# Altium PCB BatteryHolder.PcbDoc
Units mm, origin at the board's own origin, x right, y up, seen from the top; angles counter-clockwise.
Board outline 110 x 60 mm, 2 copper layers (Top Layer, Bottom Layer); 33 components, 3 nets, 237 pads, 206 vias.
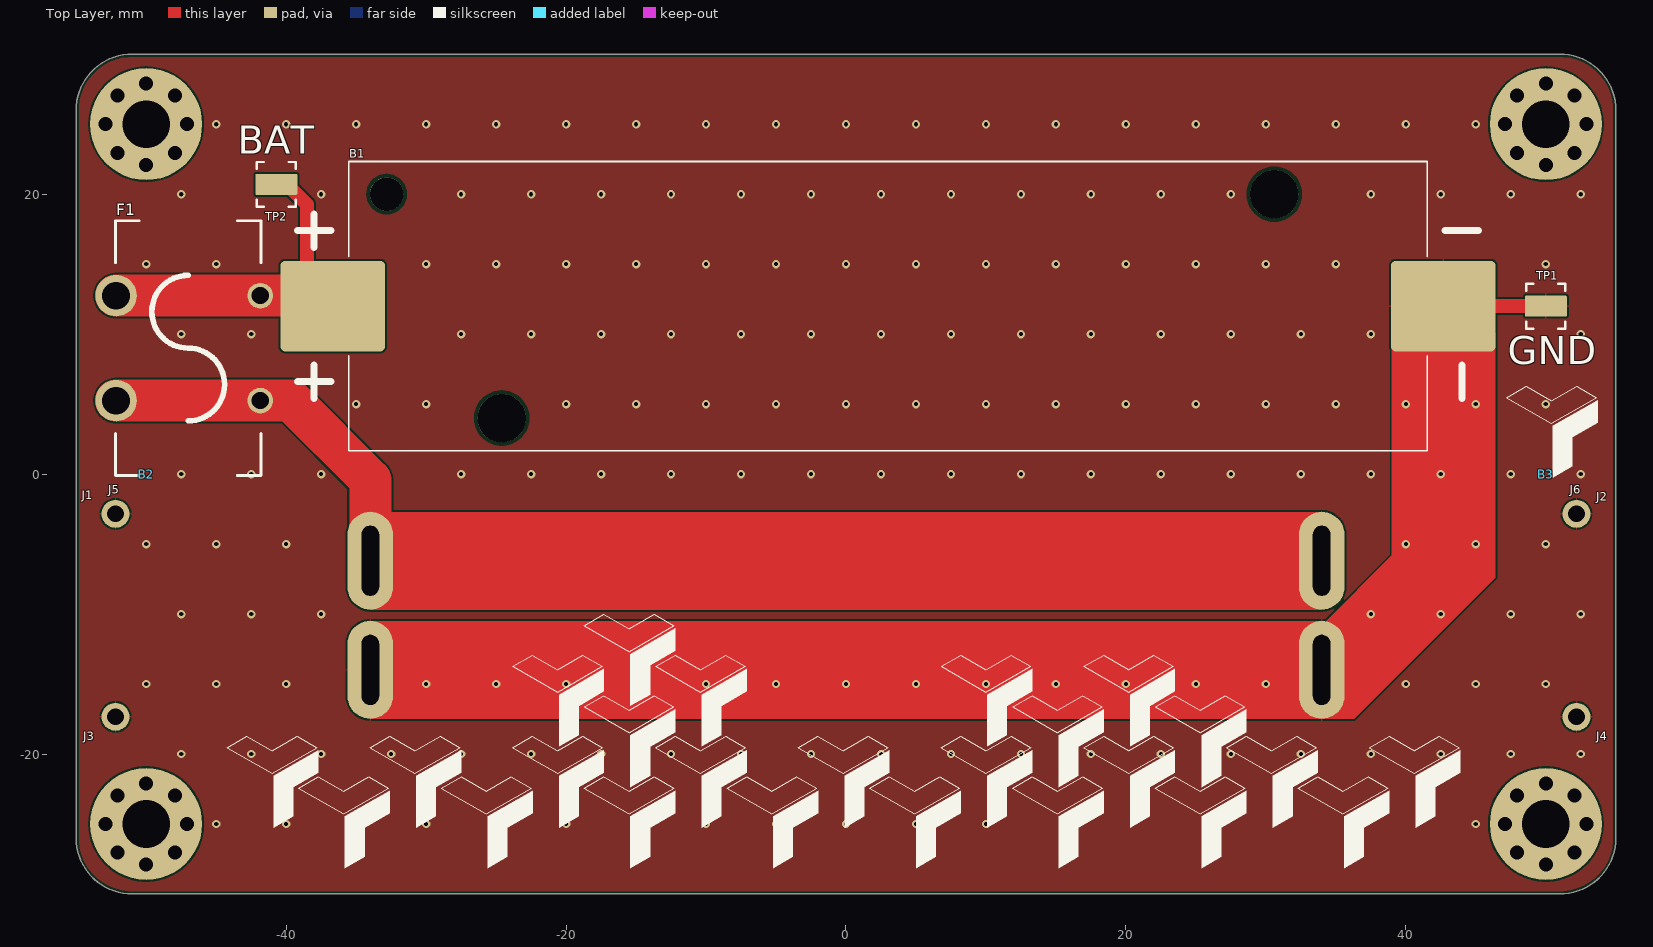
[diagram p0: Top Layer view]
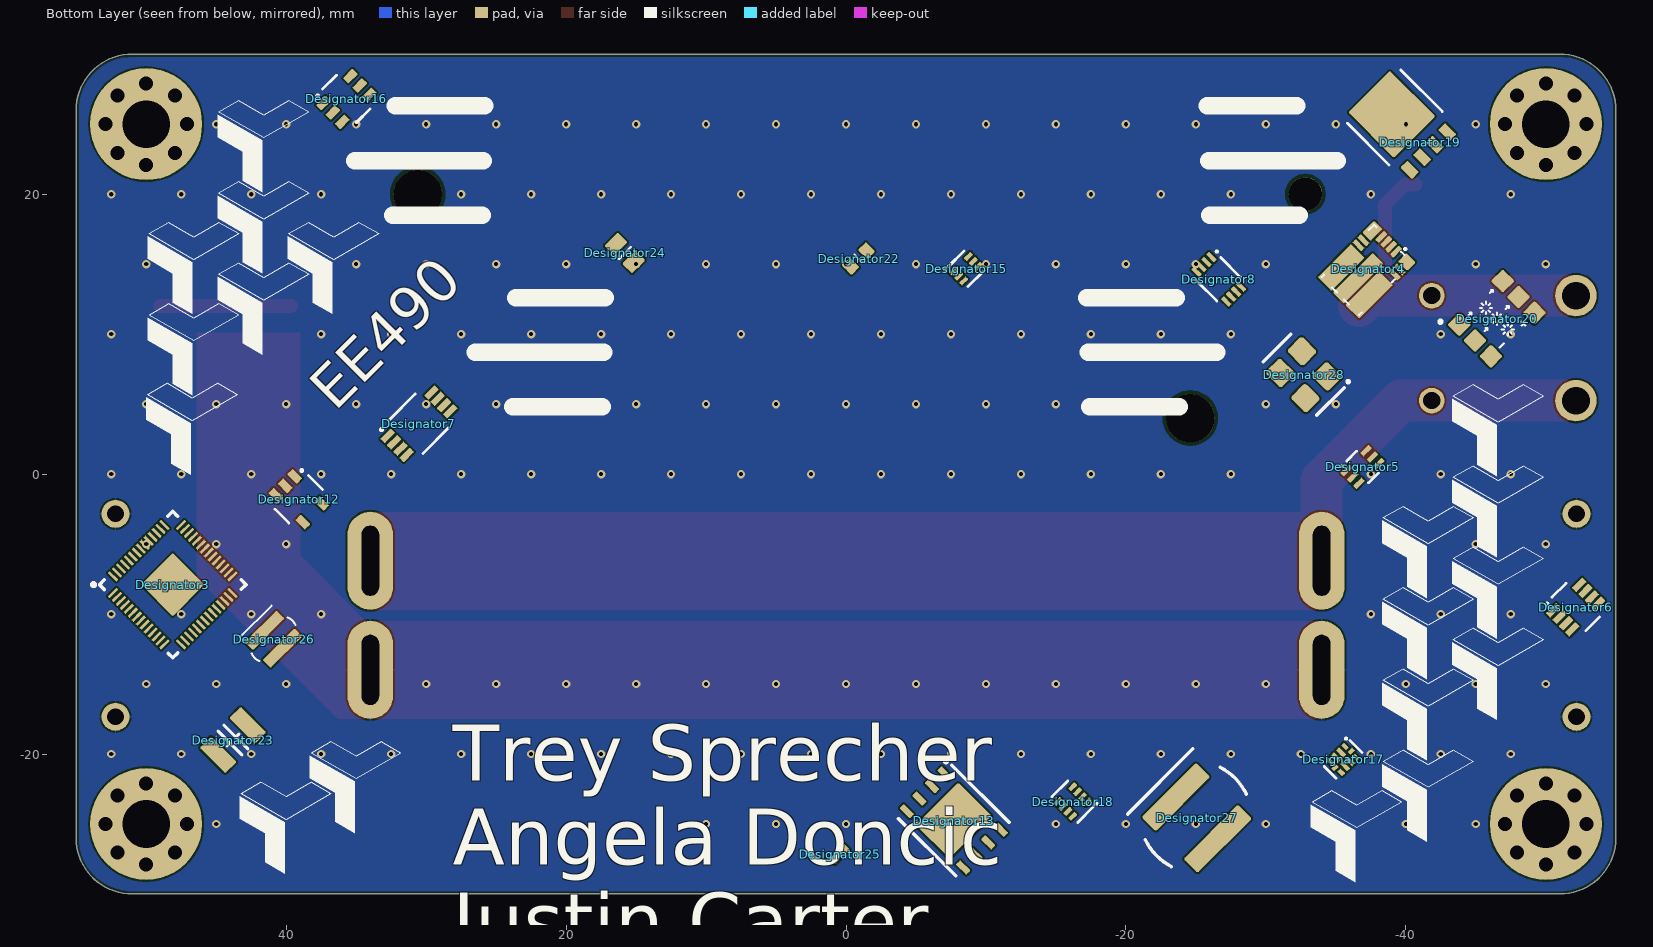
[diagram p1: Bottom Layer view, seen from below]
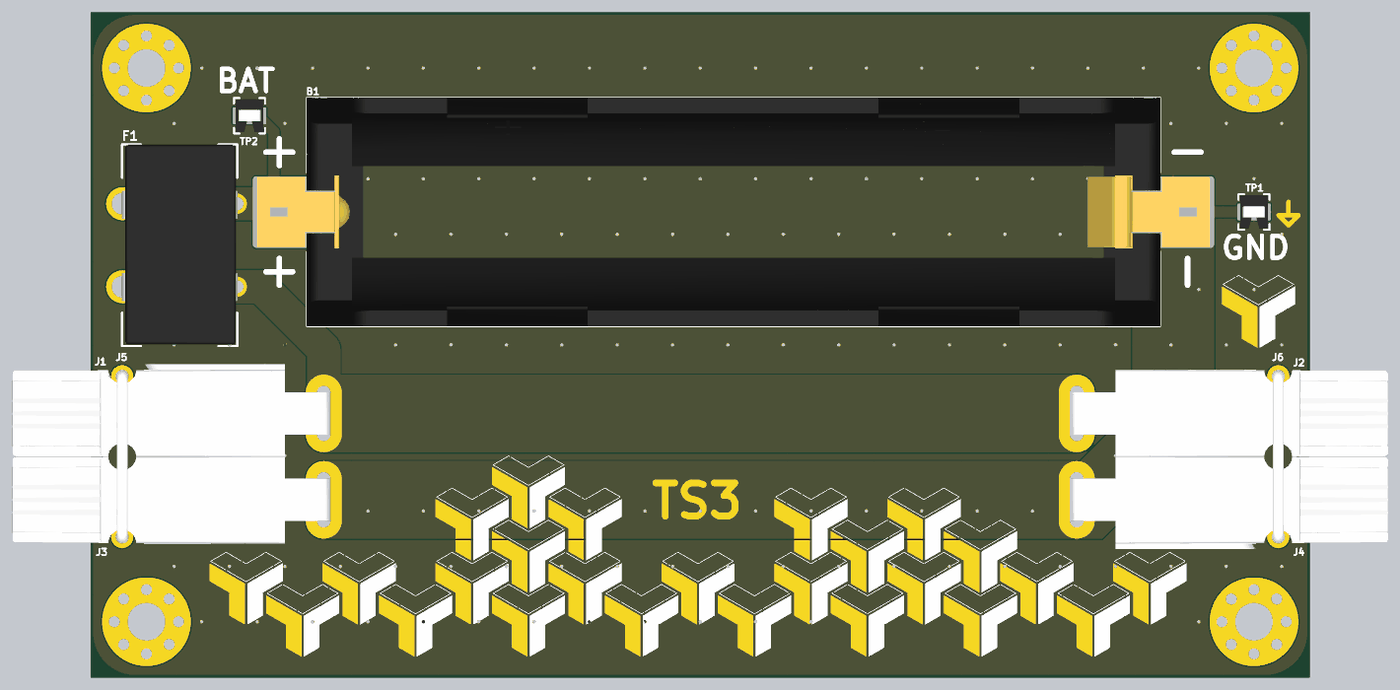
[diagram p2: 3D render of the assembled board from above, using the file's embedded part models]
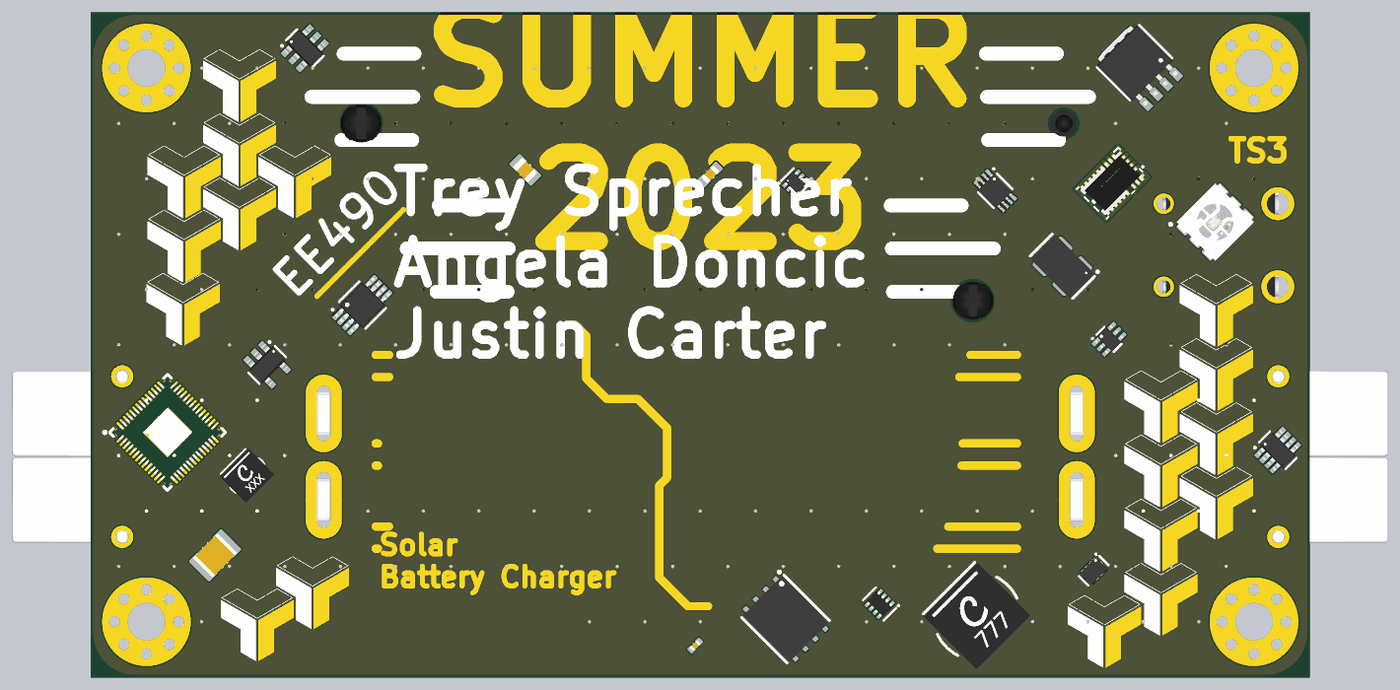
[diagram p3: 3D render of the assembled board from below, using the file's embedded part models]

## Layer stack, top to bottom
Top Solder: solder mask 0.0102, Solder Resist, Dk 3.5
Top Layer: signal copper 0.0356
Dielectric 1: dielectric 0.32, FR-4, Dk 4.8
Bottom Layer: signal copper 0.0356
Bottom Solder: solder mask 0.0102, Solder Resist, Dk 3.5

## Board outline
-55,-26 -55,26 cw(c-51,26) -51,30 51,30 cw(c51,26) 55,26 55,-26 cw(c51,-26) 51,-30 -51,-30 cw(c-51,-26)

## Design rules (kind name [scope] priority, off if disabled: settings)
BoardOutlineClearance [All] p1: gap=0.2 ignorepadtopadclearanceinfootprint=FALSE
Clearance [All] p1: gap=0.127 ignorepadtopadclearanceinfootprint=FALSE except(0.25: Arc-Hole Track-Hole SMDPad-Hole THPad-Hole Via-Hole Fill-Hole Poly-Hole Region-Hole Text-Hole)
ComponentClearance [NOT InComponent('B1') vs NOT InComponent('B1')] p1: gap=0.127 collisioncheckmode=3 verticalgap=0.127 showdistances=TRUE
DiffPairsRouting [All] p1: maxlimit=0.254 minlimit=0.127 mostfreqgap=0.127 toplayer_minwidth=0.127 toplayer_maxwidth=25.4 toplayer_prefwidth=0.127 bottomlayer_minwidth=0.127 bottomlayer_maxwidth=25.4 bottomlayer_prefwidth=0.127 maxuncoupledlength=12.7
DiffPairsRouting DiffPairsRouting_USB [InDifferentialPair('USBD')] p2: maxlimit=0.2 minlimit=0.2 mostfreqgap=0.2 toplayer_minwidth=0.766 toplayer_maxwidth=0.766 toplayer_prefwidth=0.766 bottomlayer_minwidth=0.766 bottomlayer_maxwidth=0.766 bottomlayer_prefwidth=0.766 impedanceprofiledriven=TRUE impedanceprofileid={7DB69605-737D-4C2B-A8A7-E868D9FD1BFF} maxuncoupledlength=12.7
Height [All] p1: minheight=0 maxheight=1816.048 prefheight=12.7
HoleSize [All] p1: absolutevalues=TRUE maxlimit=6.3 minlimit=0.3 maxpercent=80.000 minpercent=20.000
HoleToHoleClearance [All] p1: gap=0.25 allowstackedmicrovias=FALSE
MinimumAnnularRing [All] p1: minimumring=0.15
MinimumSolderMaskSliver [All] p1: minsoldermaskwidth=0
PlaneClearance [All] p1: clearance=0.127
PlaneConnect PlaneConnectPowerPads [InPadClass('PowerPads')] p1: planeconnectstyle=Direct reliefexpansion=0.508 reliefentries=4 reliefconductorwidth=0.254 reliefairgap=0.254
PlaneConnect [All] p2: pad.planeconnectstyle=Relief pad.reliefexpansion=0.3 pad.reliefentries=4 pad.reliefconductorwidth=0.127 pad.reliefairgap=0.127 via.planeconnectstyle=Direct via.reliefexpansion=0.3 via.reliefentries=4 via.reliefconductorwidth=0.127 via.reliefairgap=0.127
PolygonConnect PolygonConnectPowerPads [All vs (InPadClass('PowerPads'))] p1: connectstyle=Direct reliefconductorwidth=0.254 reliefentries=4 polygonreliefangle="90 Angle" airgapwidth=0.254
PolygonConnect [All] p2: thpad.connectstyle=Relief thpad.reliefconductorwidth=0.127 thpad.reliefentries=4 thpad.polygonreliefangle="90 Angle" thpad.airgapwidth=0.127 smdpad.connectstyle=Relief smdpad.reliefconductorwidth=0.127 smdpad.reliefentries=4 smdpad.polygonreliefangle="90 Angle" smdpad.airgapwidth=0.127 via.connectstyle=Direct via.reliefconductorwidth=0.127 via.reliefentries=4 via.polygonreliefangle="90 Angle" via.airgapwidth=0.127
RoutingVias [All] p1: holewidth=0.3 width=0.5 viastyle="Through Hole" minholewidth=0.3 minwidth=0.5 maxholewidth=0.6 maxwidth=6.6
SilkToSilkClearance [All] p1: silktosilkclearance=0
SilkToSolderMaskClearance [IsPad] p1: minsilkscreentomaskgap=0.127 clearancetoexposedcopper=TRUE
SolderMaskExpansion SolderMaskExpansion_Via [IsVia] p1: expansion=0.075 istentingtop=TRUE
SolderMaskExpansion [NOT IsVia] p2: expansion=0.075 istentingtop=FALSE
Width [All] p1: maxlimit=25.4 minlimit=0.127 preferedwidth=0.127 minimp=50.000000 maximp=50.000000 favimp=50.000000
20 further rules are at their usual default settings.

## Classes and differential pairs
component class BatteryHolder: B1 B2 B3 F1 J1 J2 J3 J4 J5 J6 TP1 TP2

## Components (designator, comment, footprint, x,y, rotation, side; value= is the part's Value field where it differs from the comment)
B1 "1042P" BATTERY_HOLDER_KEYSTONE_1042P 3,12 r180 top
B2 "Board Outline Square" PCB_OUTLINE_SQUARE#1 -25,0 r0 top
B3 "Board Outline Square" PCB_OUTLINE_SQUARE#2 25,0 r0 top
Designator3 "Comment" QFN-56(7x7)_RASPBERRYPI 48.1,-7.9 r135 bottom
Designator4 "Comment" QFN-13_EPC_EPC2310X -37.2,14.6 r315 bottom
Designator5 "Comment" SC70-6(DCK0006A)_TI -36.907,0.507 r135 bottom
Designator6 "Comment" SOT23-8(DDF0008A)_TI -52.139,-9.501 r135 bottom
Designator7 "Comment" VSSOP-8(DGK0008A)_TI 30.5,3.6 r135 bottom
Designator8 "Comment" VSSOP-8(DCU0008A)_TI -26.637,13.916 r225 bottom
Designator12 "Comment" SOT23-5(DBV0005A)_TI 39.1,-1.8 r225 bottom
Designator13 "Comment" WSON-8(6x5mm)_WINBOND -7.705,-24.751 r225 bottom
Designator15 "Comment" SOT-563(DRL0006A)_TI -8.577,14.67 r135 bottom
Designator16 "Comment" SOT23-6(DBV0006A)_TI 35.7,26.8 r135 bottom
Designator17 "Comment" WQFN-10(RYZ0010A)_TI -35.516,-20.384 r225 bottom
Designator18 "Comment" SOT-583(DRL0008A)_TI -16.2,-23.4 r315 bottom
Designator19 "Comment" SOT1023(LFPAK56E)_NEXPERIA -39.849,24.851 r135 bottom
Designator20 "Comment" 5X5MM(6PIN)_JLEAD_GENERIC -46.5,11.1 r135 bottom
Designator22 "Comment" CAPACITOR_0603(1608)_GENERIC -0.9,15.4 r135 bottom
Designator23 "Comment" CAPACITOR_1210(3225)_GENERIC 43.8,-19 r315 bottom
Designator24 "Comment" CAPACITOR_0805(2012)_GENERIC 15.8,15.8 r225 bottom
Designator25 "Comment" CAPACITOR_0402(1005)_GENERIC 0.454,-27.154 r315 bottom
Designator26 "Comment" XGL3512_COILCRAFT 40.9,-11.8 r135 bottom
Designator27 "Comment" XGL6060_COILCRAFT -25,-24.5 r135 bottom
Designator28 "Comment" 4-SMD(4-QFN)_SiTime -32.7,7.1 r315 bottom
F1 "3549-2" FUSE_HOLDER_KEYSTONE_3549-2 -47,9 r270 top
J1 "PP45" CONNECTOR_BTOC_PP45_ANDERSON -33.99,-6.19 r270 top
J2 "PP45" CONNECTOR_BTOC_PP45_ANDERSON 33.99,-6.19 r90 top
J3 "PP45" CONNECTOR_BTOC_PP45_ANDERSON -33.99,-13.99 r270 top
J4 "PP45" CONNECTOR_BTOC_PP45_ANDERSON 33.99,-13.99 r90 top
J5 "PP45 Staple" CONNECTOR_ACCESSORY_PP45-STAPLE_ANDERSON -52.19,-10.09 r270 top
J6 "PP45 Staple" CONNECTOR_ACCESSORY_PP45-STAPLE_ANDERSON 52.19,-10.09 r90 top
TP1 "519XTR" TESTPOINT_LOOP_SMD_KEYSTONE_519X 50,12 r0 top
TP2 "519XTR" TESTPOINT_LOOP_SMD_KEYSTONE_519X -40.7,20.7 r0 top

## Footprints (in the part's own frame and the unit in brackets; to place one, negate y for a bottom-side part, rotate by r counter-clockwise, add the part's x,y. Pads: shape width x height; smd on the part's side, far side on the other; paste and mask are expansions set on the pad)
4-SMD(4-QFN)_SiTime [mm]
  rrect30% 1.5x1.6 smd: 1(-1.1,1.27) 2(1.1,1.27) 3(-1.1,-1.27) 4(1.1,-1.27)
  silkscreen extent -1.95,-2.7 1.4,2.7, body extent -1.6,-2.5 1.6,2.5, height 0.83
5X5MM(6PIN)_JLEAD_GENERIC [mm]
  rrect20% 1.2x1.2 smd: 1(-2.2,1.6) 2(-2.2,0) 3(-2.2,-1.6) 4(2.2,-1.6) 5(2.2,0) 6(2.2,1.6)
  silkscreen extent -3.1,-1.8 1.3,2.8, body extent -2.75,-2.5 2.75,2.5, height 1.55
BATTERY_HOLDER_KEYSTONE_1042P [mm]
  rrect10% 7.46x6.47 smd: N(-39.67,0) P(39.67,0)
  round 3.45 hole 3.45 unplated: ""(-27.6,-8) ""(27.6,8)
  round 2.39 hole 2.39 unplated: ""(35.82,-8)
  silkscreen extent -42.2,-10.33 42.2,10.33, body extent -43,-10.33 43,10.33, height 14.86
CAPACITOR_0402(1005)_GENERIC [mm]
  rrect20% 0.5x0.6 smd: 1(-0.5,0) 2(0.5,0)
  silkscreen extent 0,-0.2 0,0.2, body extent -0.5,-0.25 0.5,0.25, height 0.55
CAPACITOR_0603(1608)_GENERIC [mm]
  rrect20% 0.8x0.95 smd: 1(-0.8,0) 2(0.8,0)
  silkscreen extent 0,-0.4 0,0.4, body extent -0.8,-0.4 0.8,0.4, height 0.9
CAPACITOR_0805(2012)_GENERIC [mm]
  rrect20% 1x1.35 smd: 1(-0.9,0) 2(0.9,0)
  silkscreen extent 0,-0.6 0,0.6, body extent -1,-0.62 1,0.62, height 1.35
CAPACITOR_1210(3225)_GENERIC [mm]
  rrect20% 1.15x2.6 smd: 1(-1.5,0) 2(1.5,0)
  silkscreen extent -0.6,-1.2 0.6,1.2, body extent -1.6,-1.25 1.6,1.25, height 2
CONNECTOR_ACCESSORY_PP45-STAPLE_ANDERSON [mm]
  round 2 hole 1.2: 1(-7.25,0) 1(7.25,0)
  oval 7x3.25 on Mech16: ""(-4,18.2) ""(3.9,18.2)
  body extent -7.75,-0.5 7.75,0.5, height 9.4
CONNECTOR_BTOC_PP45_ANDERSON [mm]
  oval 7x3.25 hole 1.25 slot 5 at 0 deg: 1(0,0)
  oval 7x3.25 on Mech16: ""(-7.9,0) ""(0,7.92) ""(7.9,0)
  body extent -4.45,-28.1 3.96,0.52, height 8.39
FUSE_HOLDER_KEYSTONE_3549-2 [mm]
  round 1.83 hole 1.22: 1(-3.75,5.15) 2(3.75,5.15)
  round 2.97 hole 1.98: 1(-3.75,-5.15) 2(3.75,-5.15)
  silkscreen extent -9.1,-5.2 9.1,5.2, body extent -9.08,-5.22 8.95,5.25, height 5.79
PCB_OUTLINE_SQUARE#1 [mm]
  round 8 hole 3.4: 1(-25,-25) 1(-25,25)
PCB_OUTLINE_SQUARE#2 [mm]
  round 8 hole 3.4: 1(25,-25) 1(25,25)
QFN-13_EPC_EPC2310X [mm]
  rrect30% 0.9x0.35 smd paste-1 mask-1: 1(-2.401,0.576) 2(-2.401,0.076) 3(-2.401,-0.424) 4(-2.401,-0.924)
  rrect20% 1.2x0.85 smd paste-1 mask-1: 5(-2.251,-1.674)
  rrect30% 0.35x0.9 smd paste-1 mask-1: 6(-1.326,-1.649) 7(-0.826,-1.649) 11(-1.176,1.651) 12(-1.676,1.651)
  rrect10% 3.35x1.395 smd paste-1 mask-1: 8(1.174,-1.401)
  rrect10% 4x1.1 smd paste-1 mask-1: 9(0.849,0.002)
  rrect10% 3.4x1.395 smd paste-1 mask-1: 10(1.149,1.403)
  rrect20% 0.85x0.95 smd paste-1 mask-1: 13(-2.426,1.626)
  rrect50% 0.52x0.3 on Bottom Solder paste-1 mask-1: ""(-2.303,-0.424) ""(-2.303,0.576) ""(-2.303,-0.924) ""(-2.303,0.076)
  rrect50% 0.535x0.3 on Bottom Solder paste-1 mask-1: ""(-2.301,1.426)
  rrect50% 0.3x0.535 on Bottom Solder paste-1 mask-1: ""(-2.176,1.544)
  rrect50% 0.888x0.3 on Bottom Solder paste-1 mask-1: ""(-2.12,-1.424)
  rrect50% 0.3x0.52 on Bottom Solder paste-1 mask-1: ""(-1.826,-1.549) ""(-1.676,1.551) ""(-1.326,-1.549) ""(-1.176,1.551) ""(-0.826,-1.549) ""(-0.326,1.551) ""(-0.326,-1.549) ""(0.174,-1.549) ""(0.174,1.551) ""(0.674,-1.549) ""(0.674,1.551) ""(1.174,-1.549) ""(1.174,1.551) ""(1.674,-1.549) ""(1.674,1.551) ""(2.174,-1.549) ""(2.174,1.551)
  rrect50% 3.405x0.48 on Bottom Solder paste-1 mask-1: ""(0.809,0.002)
  rrect50% 3x0.59 on Bottom Solder paste-1 mask-1: ""(1.023,-1.309) ""(1.023,1.311)
  silkscreen extent -3.05,-1.9 2.65,1.9, body extent -2.5,-1.75 2.5,1.75, height 0.56
QFN-56(7x7)_RASPBERRYPI [mm]
  rrect30% 0.875x0.2 smd paste-2539.97 mask+0: 1(-3.435,2.6) 2(-3.435,2.2) 3(-3.435,1.8) 4(-3.435,1.4) 5(-3.435,1) 6(-3.435,0.6) 7(-3.435,0.2) 8(-3.435,-0.2) 9(-3.435,-0.6) 10(-3.435,-1) 11(-3.435,-1.4) 12(-3.435,-1.8) 13(-3.435,-2.2) 14(-3.435,-2.6) 29(3.435,-2.6) 30(3.435,-2.2) 31(3.435,-1.8) 32(3.435,-1.4) 33(3.435,-1) 34(3.435,-0.6) 35(3.435,-0.2) 36(3.435,0.2) 37(3.435,0.6) 38(3.435,1) 39(3.435,1.4) 40(3.435,1.8) 41(3.435,2.2) 42(3.435,2.6)
  rrect30% 0.2x0.875 smd paste-2539.97 mask+0: 15(-2.6,-3.435) 16(-2.2,-3.435) 17(-1.8,-3.435) 18(-1.4,-3.435) 19(-1,-3.435) 20(-0.6,-3.435) 21(-0.2,-3.435) 22(0.2,-3.435) 23(0.6,-3.435) 24(1,-3.435) 25(1.4,-3.435) 26(1.8,-3.435) 27(2.2,-3.435) 28(2.6,-3.435) 43(2.6,3.435) 44(2.2,3.435) 45(1.8,3.435) 46(1.4,3.435) 47(1,3.435) 48(0.6,3.435) 49(0.2,3.435) 50(-0.2,3.435) 51(-0.6,3.435) 52(-1,3.435) 53(-1.4,3.435) 54(-1.8,3.435) 55(-2.2,3.435) 56(-2.6,3.435)
  rrect5% 3.2x3.2 smd paste-2539.97: 57(0,0)
  silkscreen extent -4.05,-3.7 3.7,4.05, body extent -3.5,-3.5 3.5,3.5, height 0.9
SC70-6(DCK0006A)_TI [mm]
  rrect20% 0.85x0.35 smd: 1(-1,0.65) 2(-1,0) 3(-1,-0.65) 4(1,-0.65) 5(1,0) 6(1,0.65)
  silkscreen extent -1.05,-1.1 0.5,1.15, body extent -1.05,-1 1.05,1, height 1
SOT23-5(DBV0005A)_TI [mm]
  rrect20% 0.972x0.558 smd: 1(-1.362,0.95) 2(-1.362,0) 3(-1.362,-0.95) 4(1.362,-0.95) 5(1.362,0.95)
  silkscreen extent -1.35,-1.7 0.7,1.7, body extent -1.5,-1.52 1.5,1.52, height 1.45
SOT23-6(DBV0006A)_TI [mm]
  rrect20% 0.972x0.558 smd: 1(-1.362,0.95) 2(-1.362,0) 3(-1.362,-0.95) 4(1.362,-0.95) 5(1.362,0) 6(1.362,0.95)
  silkscreen extent -1.35,-1.7 0.7,1.7, body extent -1.5,-1.52 1.5,1.52, height 1.45
SOT23-8(DDF0008A)_TI [mm]
  rrect20% 1.05x0.45 smd mask+0.025: 1(-1.3,0.975) 2(-1.3,0.325) 3(-1.3,-0.325) 4(-1.3,-0.95) 5(1.3,-0.95) 6(1.3,-0.325) 7(1.3,0.325) 8(1.3,0.95)
  silkscreen extent -1.35,-1.7 0.7,1.7, body extent -1.47,-1.47 1.47,1.47, height 1.09
SOT1023(LFPAK56E)_NEXPERIA [mm]
  rrect5% 4.2x4.6 smd paste-2539.97: 1(0,1.2)
  rrect20% 0.7x1.15 smd: 2(1.905,-2.5) 3(-1.905,-2.5) 3(-0.635,-2.5) 3(0.635,-2.5)
  silkscreen extent -2.7,-1.2 2.7,3, body extent -2.55,-2.56 2.55,3.58, height 1.03
SOT-563(DRL0006A)_TI [mm]
  rrect30% 0.65x0.3 smd mask+0.025: 1(-0.74,0.5) 2(-0.74,0) 3(-0.74,-0.5) 4(0.74,-0.5) 5(0.74,0) 6(0.74,0.5)
  silkscreen extent -1.15,-1 0.8,1.05, body extent -0.8,-0.8 0.8,0.8, height 0.6
SOT-583(DRL0008A)_TI [mm]
  rrect30% 0.65x0.3 smd mask+0.025: 1(-0.74,0.75) 2(-0.74,0.25) 3(-0.74,-0.25) 4(-0.74,-0.75) 5(0.74,-0.75) 6(0.74,-0.25) 7(0.74,0.25) 8(0.74,0.75)
  silkscreen extent -1.15,-1.3 0.8,1.35, body extent -0.8,-1.05 0.8,1.05, height 0.6
TESTPOINT_LOOP_SMD_KEYSTONE_519X [mm]
  rrect10% 3x1.5 smd: 1(0,0)
  silkscreen extent -1.4,-1.6 1.4,1.6, body extent -1.25,-1.5 1.25,1.5, height 2.49
VSSOP-8(DCU0008A)_TI [mm]
  rrect30% 0.8x0.3 smd mask+0.05: 1(-1.5,0.75) 2(-1.5,0.25) 3(-1.5,-0.25) 4(-1.5,-0.75) 5(1.5,-0.75) 6(1.5,-0.25) 7(1.5,0.25) 8(1.5,0.75)
  silkscreen extent -1.55,-1.2 1,1.35, body extent -1.55,-1 1.55,1, height 0.77
VSSOP-8(DGK0008A)_TI [mm]
  rrect20% 1.05x0.45 smd mask+0.035: 1(-2.2,0.975) 2(-2.2,0.325) 3(-2.2,-0.325) 4(-2.2,-0.95) 5(2.2,-0.95) 6(2.2,-0.325) 7(2.2,0.325) 8(2.2,0.95)
  silkscreen extent -2.25,-1.7 1.3,1.7, body extent -2.45,-1.5 2.45,1.5, height 1.1
WQFN-10(RYZ0010A)_TI [mil]
  rrect20% 19x12 smd mask+0.98: 1(-22.15,29.53) 4(-22.15,-29.53) 6(22.15,-29.53) 9(22.15,29.53)
  rrect20% 29x12 smd mask+0.98: 2(-17.72,9.84) 3(-17.72,-9.84) 7(17.72,-9.84) 8(17.72,9.84)
  rrect20% 12x18 smd mask+0.98: 5(0,-32.53) 10(0,32.53)
  silkscreen extent -37,-51 24,51, body extent -30,-39 30,39, height 31
WSON-8(6x5mm)_WINBOND [mm]
  rrect30% 1.05x0.45 smd: 1(-2.845,1.905) 2(-2.845,0.635) 3(-2.845,-0.635) 4(-2.845,-1.905) 5(2.845,-1.905) 6(2.845,-0.635) 7(2.845,0.635) 8(2.845,1.905)
  rrect8% 3.4x4.3 smd paste-3: 9(0,0)
  silkscreen extent -3.5,-2.7 2.9,2.7, body extent -3,-2.5 3,2.5, height 0.8
XGL3512_COILCRAFT [mm]
  rrect20% 3.2x0.81 smd: 1(0,0.9) 2(0,-0.9)
  silkscreen extent -1.9,-0.38 1.9,1.8, body extent -1.82,-1.68 1.82,1.68, height 1.2
XGL6060_COILCRAFT [mm]
  rrect20% 5.5x1.43 smd: 1(0,2.02) 2(0,-2.2)
  silkscreen extent -3.94,-1.4 3.94,3.6, body extent -3.45,-3.35 3.45,3.35, height 6

## Part data
B1: library part "Battery - Holder - Keystone 1042P", Supplier Part Number 1=36-1042P-ND, Supplier 1=Digi-Key, Supplier 2=Mouser, Supplier Part Number 2=534-1042P
B2 B3: library part Board_Outline_Square
F1: library part "Fuse - Holder - Keystone 3549-2", Supplier Part Number 1=36-3549-2-ND, Supplier 1=Digi-Key, Supplier 2=Mouser, Supplier Part Number 2=534-3549-2
J1 J2 J3 J4: library part "Connector - Modular - 1P - Anderson PP45"
J5 J6: library part "Connector - Accessory - Mechanical Support - Anderson PP45 Staple"
TP1 TP2: library part "Test Point - SMT - Loop - Keystone 519X"

## Via types
v1: diameter 0.6, hole 0.3, Top Layer to Bottom Layer, tented both sides, 174 vias
v2: diameter 1.4, hole 1, Top Layer to Bottom Layer, tented both sides, 32 vias

## Nets (pads, with @x,y where several pads share a name; then routed paths per layer and width w, separated by ;. In a path a pad name is that pad's centre, name@x,y a point inside that pad or via, vN(x,y) a via of type N, cw(c..) or ccw(c..) an arc to the next point about the centre after c; other vN are vias at no path point)
GND: B1.N J3.1 J4.1 J5.1 J6.1 TP1.1 | length 9.3
  Top Layer w1: B1.N@39.67,12 TP1.1@49,12
  other v1: -45,-25 -40,-25 -35,-25 -30,-25 -25,-25 -20,-25 -15,-25 -10,-25 -5,-25 0,-25 5,-25 10,-25 45,-25 -47.5,-20 -42.5,-20 -37.5,-20 -32.5,-20 -27.5,-20 -22.5,-20 -17.5,-20 -12.5,-20 -7.5,-20 -2.5,-20 2.5,-20 7.5,-20 12.5,-20 17.5,-20 22.5,-20 27.5,-20 32.5,-20 37.5,-20 42.5,-20 47.5,-20 52.5,-20 -50,-15 -45,-15 -40,-15 -30,-15 -25,-15 -20,-15 -15,-15 -10,-15 -5,-15 0,-15 5,-15 10,-15 15,-15 20,-15 25,-15 30,-15 40,-15 45,-15 50,-15 -47.5,-10 -42.5,-10 -37.5,-10 37.5,-10 42.5,-10 47.5,-10 52.5,-10 -50,-5 -45,-5 -40,-5 40,-5 45,-5 50,-5 -47.5,0 -42.5,0 -37.5,0 -27.5,0 -22.5,0 -17.5,0 -12.5,0 -7.5,0 -2.5,0 2.5,0 7.5,0 12.5,0 17.5,0 22.5,0 27.5,0 32.5,0 37.5,0 42.5,0 47.5,0 52.5,0 -35,5 -30,5 -20,5 -15,5 -10,5 -5,5 0,5 5,5 10,5 15,5 20,5 25,5 30,5 35,5 40,5 45,5 50,5 -47.5,10 -42.5,10 -27.5,10 -22.5,10 -17.5,10 -12.5,10 -7.5,10 -2.5,10 2.5,10 7.5,10 12.5,10 17.5,10 22.5,10 27.5,10 32.5,10 37.5,10 52.5,10 -50,15 -45,15 -30,15 -25,15 -20,15 -15,15 -10,15 -5,15 0,15 5,15 10,15 15,15 20,15 25,15 30,15 35,15 50,15 -47.5,20 -37.5,20 -27.5,20 -22.5,20 -17.5,20 -12.5,20 -7.5,20 -2.5,20 2.5,20 7.5,20 12.5,20 17.5,20 22.5,20 27.5,20 37.5,20 42.5,20 47.5,20 52.5,20 -45,25 -40,25 -35,25 -30,25 -25,25 -20,25 -15,25 -10,25 -5,25 0,25 5,25 10,25 15,25 20,25 25,25 30,25 35,25 40,25 45,25
NetB1_P: B1.P F1.1 TP2.1 | length 27.9
  Top Layer w1: TP2.1 -39.95,20.7 -38.5,19.25 B1.P@-38.5,13.83 ; -40.605,12 -38.5,12 B1.P
  Top Layer w3: F1.1@-52.15,12.75 -43.3,12.75 -41.85,12.75 -40.7,12.75 -38.5,12.75 -37.42,12.75 B1.P
VP: F1.2 J1.1 J2.1 | length 26.3
  Top Layer w3: F1.2@-52.15,5.25 -39.65,5.25 -33.99,-0.41 J1.1
pads on no net: B1. B2.1 B3.1 Designator3.1 Designator3.2 Designator3.3 Designator3.4 Designator3.5 Designator3.6 Designator3.7 Designator3.8 Designator3.9 Designator3.10 Designator3.11 Designator3.12 Designator3.13 Designator3.14 Designator3.15 Designator3.16 Designator3.17 Designator3.18 Designator3.19 Designator3.20 Designator3.21 Designator3.22 Designator3.23 Designator3.24 Designator3.25 Designator3.26 Designator3.27 Designator3.28 Designator3.29 Designator3.30 Designator3.31 Designator3.32 Designator3.33 Designator3.34 Designator3.35 Designator3.36 Designator3.37 Designator3.38 Designator3.39 Designator3.40 Designator3.41 Designator3.42 Designator3.43 Designator3.44 Designator3.45 Designator3.46 Designator3.47 Designator3.48 Designator3.49 Designator3.50 Designator3.51 Designator3.52 Designator3.53 Designator3.54 Designator3.55 Designator3.56 Designator3.57 Designator4. Designator4.1 Designator4.2 Designator4.3 Designator4.4 Designator4.5 Designator4.6 Designator4.7 Designator4.8 Designator4.9 Designator4.10 Designator4.11 Designator4.12 Designator4.13 Designator5.1 Designator5.2 Designator5.3 Designator5.4 Designator5.5 Designator5.6 Designator6.1 Designator6.2 Designator6.3 Designator6.4 Designator6.5 Designator6.6 Designator6.7 Designator6.8 Designator7.1 Designator7.2 Designator7.3 Designator7.4 Designator7.5 Designator7.6 Designator7.7 Designator7.8 Designator8.1 Designator8.2 Designator8.3 Designator8.4 Designator8.5 Designator8.6 Designator8.7 Designator8.8 Designator12.1 Designator12.2 Designator12.3 Designator12.4 Designator12.5 Designator13.1 Designator13.2 Designator13.3 Designator13.4 Designator13.5 Designator13.6 Designator13.7 Designator13.8 Designator13.9 Designator15.1 Designator15.2 Designator15.3 Designator15.4 Designator15.5 Designator15.6 Designator16.1 Designator16.2 Designator16.3 Designator16.4 Designator16.5 Designator16.6 Designator17.1 Designator17.2 Designator17.3 Designator17.4 Designator17.5 Designator17.6 Designator17.7 Designator17.8 Designator17.9 Designator17.10 Designator18.1 Designator18.2 Designator18.3 Designator18.4 Designator18.5 Designator18.6 Designator18.7 Designator18.8 Designator19.1 Designator19.2 Designator19.3 Designator20.1 Designator20.2 Designator20.3 Designator20.4 Designator20.5 Designator20.6 Designator22.1 Designator22.2 Designator23.1 Designator23.2 Designator24.1 Designator24.2 Designator25.1 Designator25.2 Designator26.1 Designator26.2 Designator27.1 Designator27.2 Designator28.1 Designator28.2 Designator28.3 Designator28.4 J1. J2. J3. J4. J5. J6.
copper on no net:
  other v2: -50,-27.9 50,-27.9 -52.051,-27.051 -47.949,-27.051 47.949,-27.051 52.051,-27.051 -52.9,-25 -47.1,-25 47.1,-25 52.9,-25 -52.051,-22.949 -47.949,-22.949 47.949,-22.949 52.051,-22.949 -50,-22.1 50,-22.1 -50,22.1 50,22.1 -52.051,22.949 -47.949,22.949 47.949,22.949 52.051,22.949 -52.9,25 -47.1,25 47.1,25 52.9,25 -52.051,27.051 -47.949,27.051 47.949,27.051 52.051,27.051 -50,27.9 50,27.9

## Polygon pours and split planes (outlines as drawn)
GND on Top Layer "GND_L01_P000" (solid, remove dead copper, pour order 0): -55,30 55,30 55,-30 -55,-30
GND on Bottom Layer "GND_L02_P001" (solid, remove dead copper, pour order 1): -55,30 55,30 55,-30 -55,-30

## Other copper
Top Layer:
  rectangle net GND: -33.99,-17.49 34.01,-10.49
  rectangle net VP: -34,-9.7 34,-2.7
  region net GND: 39,10.1 39,-5.8 34.01,-10.79 34.01,-17.49 36.31,-17.49 46.4,-7.4 46.4,10.1

## Silkscreen, mask and mechanical layers (free items; w line width, h text height)
Top Overlay:
  drawing of 182 lines, arcs and shapes, not listed
  text "BAT" at -43.466,22.9 h2
  text "GND" at 47.298,7.837 h2
Bottom Overlay:
  drawing of 138 lines, arcs and shapes, not listed
  text "EE490" at 36.503,4.404 h3 r315
  text "Trey Sprecher / Angela Doncic / Justin Carter" at 28.1,-33.9 h4
Top Solder:
  drawing of 31 lines, arcs and shapes, not listed
  text "TS3" at -3.999,-15.5 h3
Bottom Solder:
  drawing of 43 lines, arcs and shapes, not listed
  text "TS3" at -47.4,16.6 h2
  text "SUMMER / 2023" at 30,0.5 h8
  text "Solar / Battery Charger" at 29.2,-26.9 h1.8
Drill Guide:
  drawing of 528 lines, arcs and shapes, not listed
Board Shape:
  lines w0.1: -51,-30 51,-30 ; -51,30 51,30
Mechanical 16:
  drawing of 88 lines, arcs and shapes, not listed